# Altium PCB TSSOP-24_L7.8-W4.4-P0.65-LS6.4-BL.pcbdoc
Units mm, origin at the board's own origin, x right, y up, seen from the top; angles counter-clockwise.
Board outline 20.6 x 20.4 mm, 2 copper layers (Top Layer, Bottom Layer), stack 0 mm thick; 1 components, 0 nets, 24 pads, 0 vias.
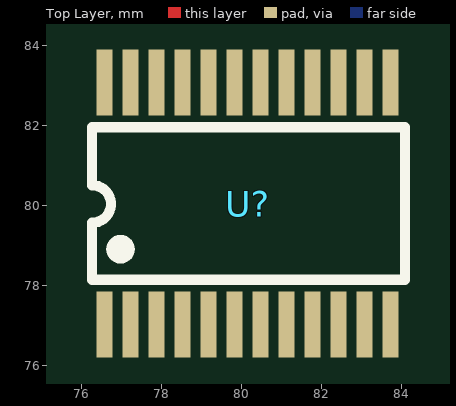
[diagram p0: Top Layer view]
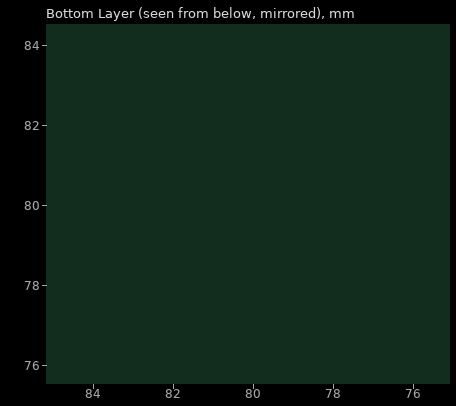
[diagram p1: Bottom Layer view, seen from below]

## Layer stack, top to bottom
Top Layer: signal copper (thickness not stored)
Bottom Layer: signal copper (thickness not stored)

## Board outline
90.447,69.85 69.85,69.85 69.85,90.245 90.447,90.245

## Components (designator, comment, footprint, x,y, rotation, side; value= is the part's Value field where it differs from the comment)
U? "" TSSOP-24_L7.8-W4.4-P0.65-LS6.4-BL 80.16,80.048 r0 top

## Footprints (in the part's own frame and the unit in brackets; to place one, negate y for a bottom-side part, rotate by r counter-clockwise, add the part's x,y. Pads: shape width x height; smd on the part's side, far side on the other; paste and mask are expansions set on the pad)
TSSOP-24_L7.8-W4.4-P0.65-LS6.4-BL [mm]
  rect 0.4x1.65 smd: 1(-3.575,-3.023) 2(-2.925,-3.023) 3(-2.275,-3.023) 4(-1.625,-3.023) 5(-0.975,-3.023) 6(-0.325,-3.023) 7(0.325,-3.023) 8(0.975,-3.023) 9(1.625,-3.023) 10(2.275,-3.023) 11(2.925,-3.023) 12(3.575,-3.023) 13(3.575,3.023) 14(2.925,3.023) 15(2.275,3.023) 16(1.625,3.023) 17(0.975,3.023) 18(0.325,3.023) 19(-0.325,3.023) 20(-0.975,3.023) 21(-1.625,3.023) 22(-2.275,3.023) 23(-2.925,3.023) 24(-3.575,3.023)
  silkscreen extent -3.89,-1.91 3.94,1.91

## Nets (pads, with @x,y where several pads share a name; then routed paths per layer and width w, separated by ;. In a path a pad name is that pad's centre, name@x,y a point inside that pad or via, vN(x,y) a via of type N, cw(c..) or ccw(c..) an arc to the next point about the centre after c; other vN are vias at no path point)
pads on no net: U?.1 U?.2 U?.3 U?.4 U?.5 U?.6 U?.7 U?.8 U?.9 U?.10 U?.11 U?.12 U?.13 U?.14 U?.15 U?.16 U?.17 U?.18 U?.19 U?.20 U?.21 U?.22 U?.23 U?.24